# Altium PCB PCB2.PcbDoc
Units mil, origin at the board's own origin, x right, y up, seen from the top; angles counter-clockwise.
Board outline 3420 x 3585 mil, 2 copper layers (Top Layer, Bottom Layer); 16 components, 16 nets, 100 pads, 9 vias.
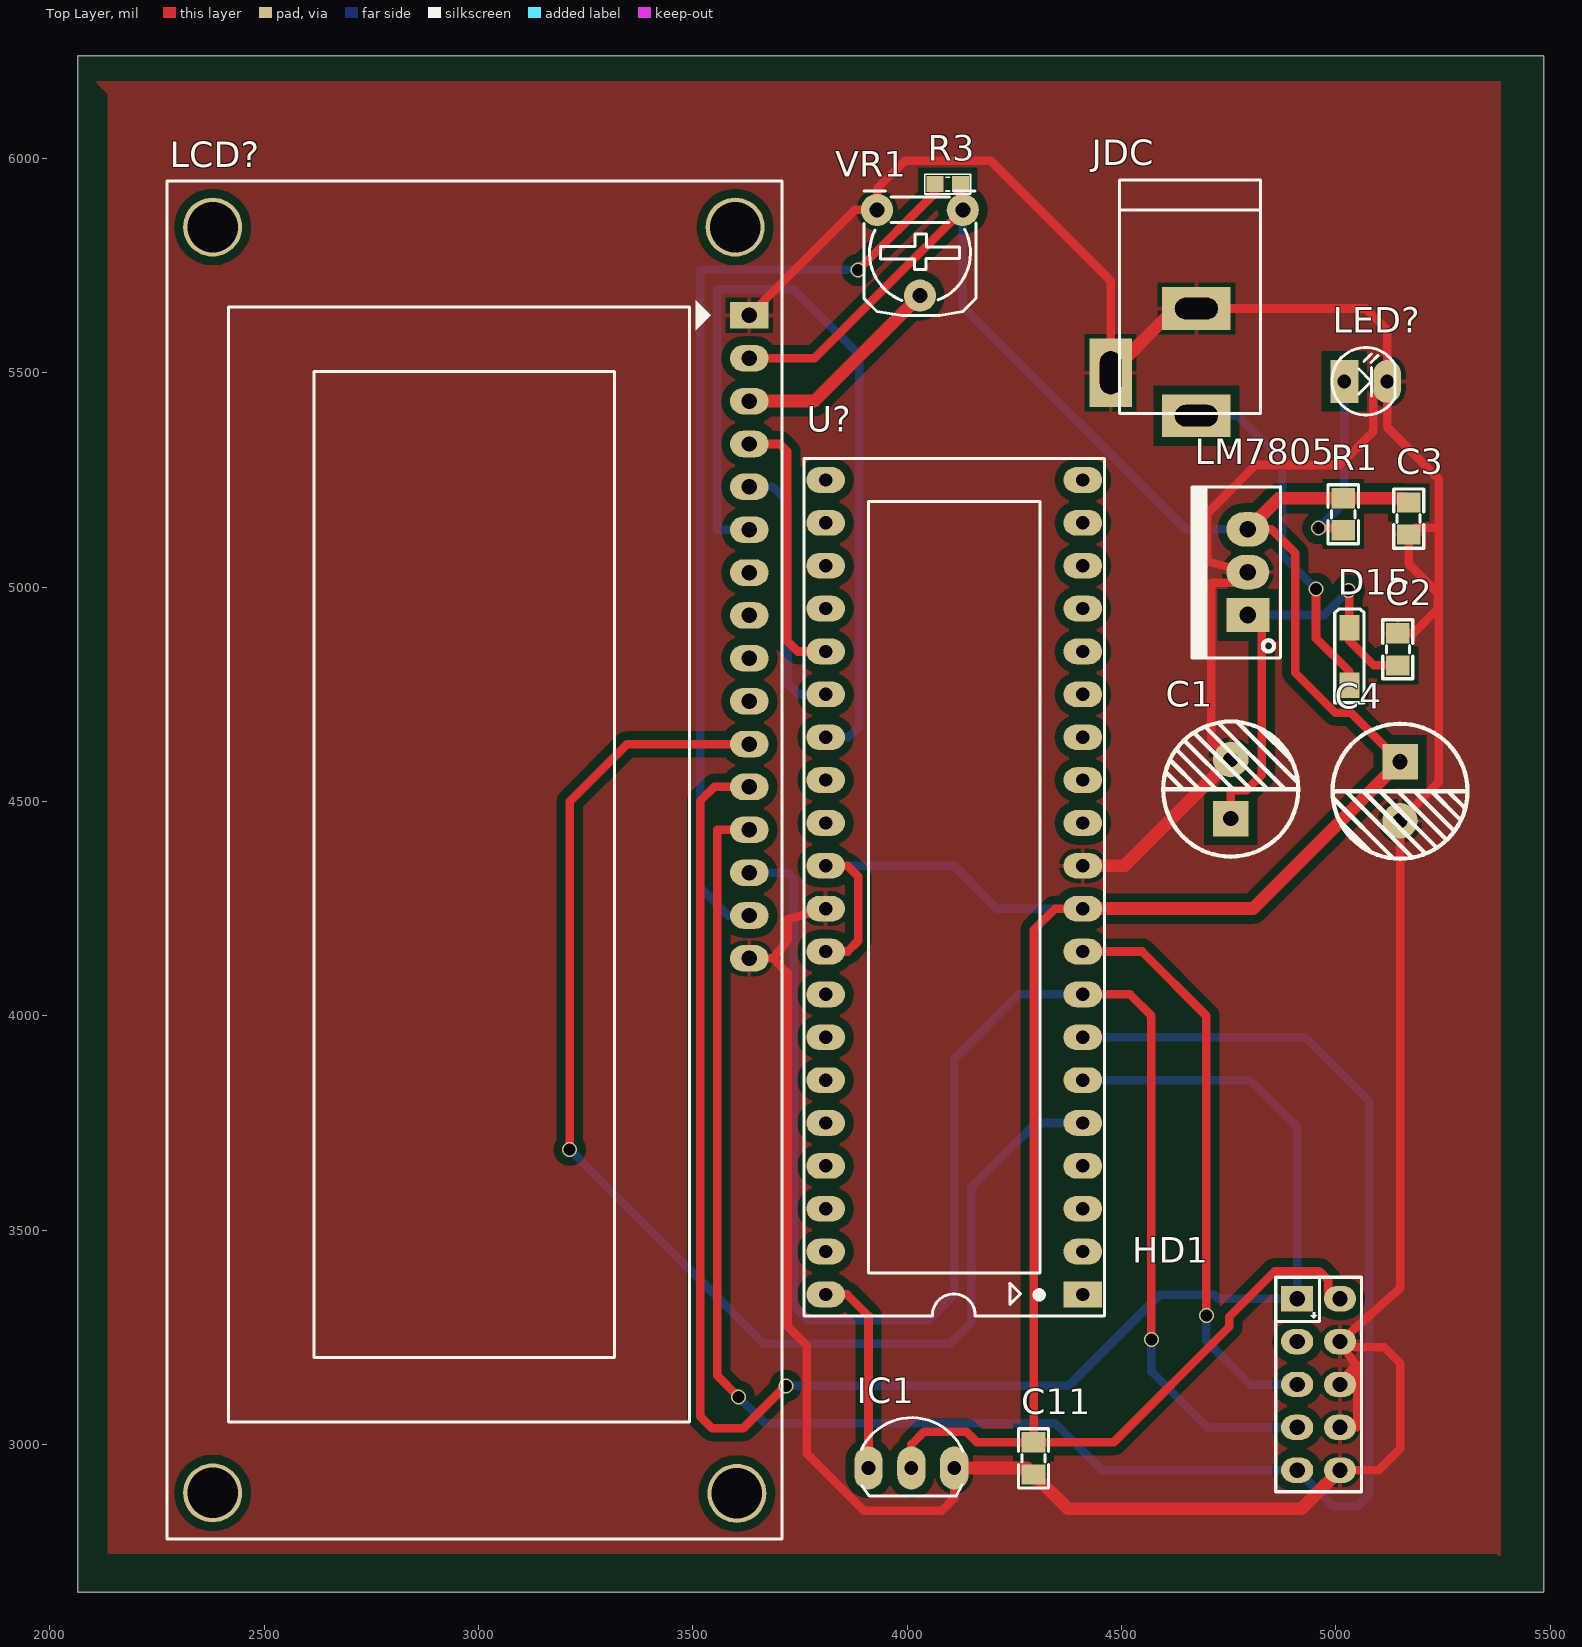
[diagram p0: Top Layer view]
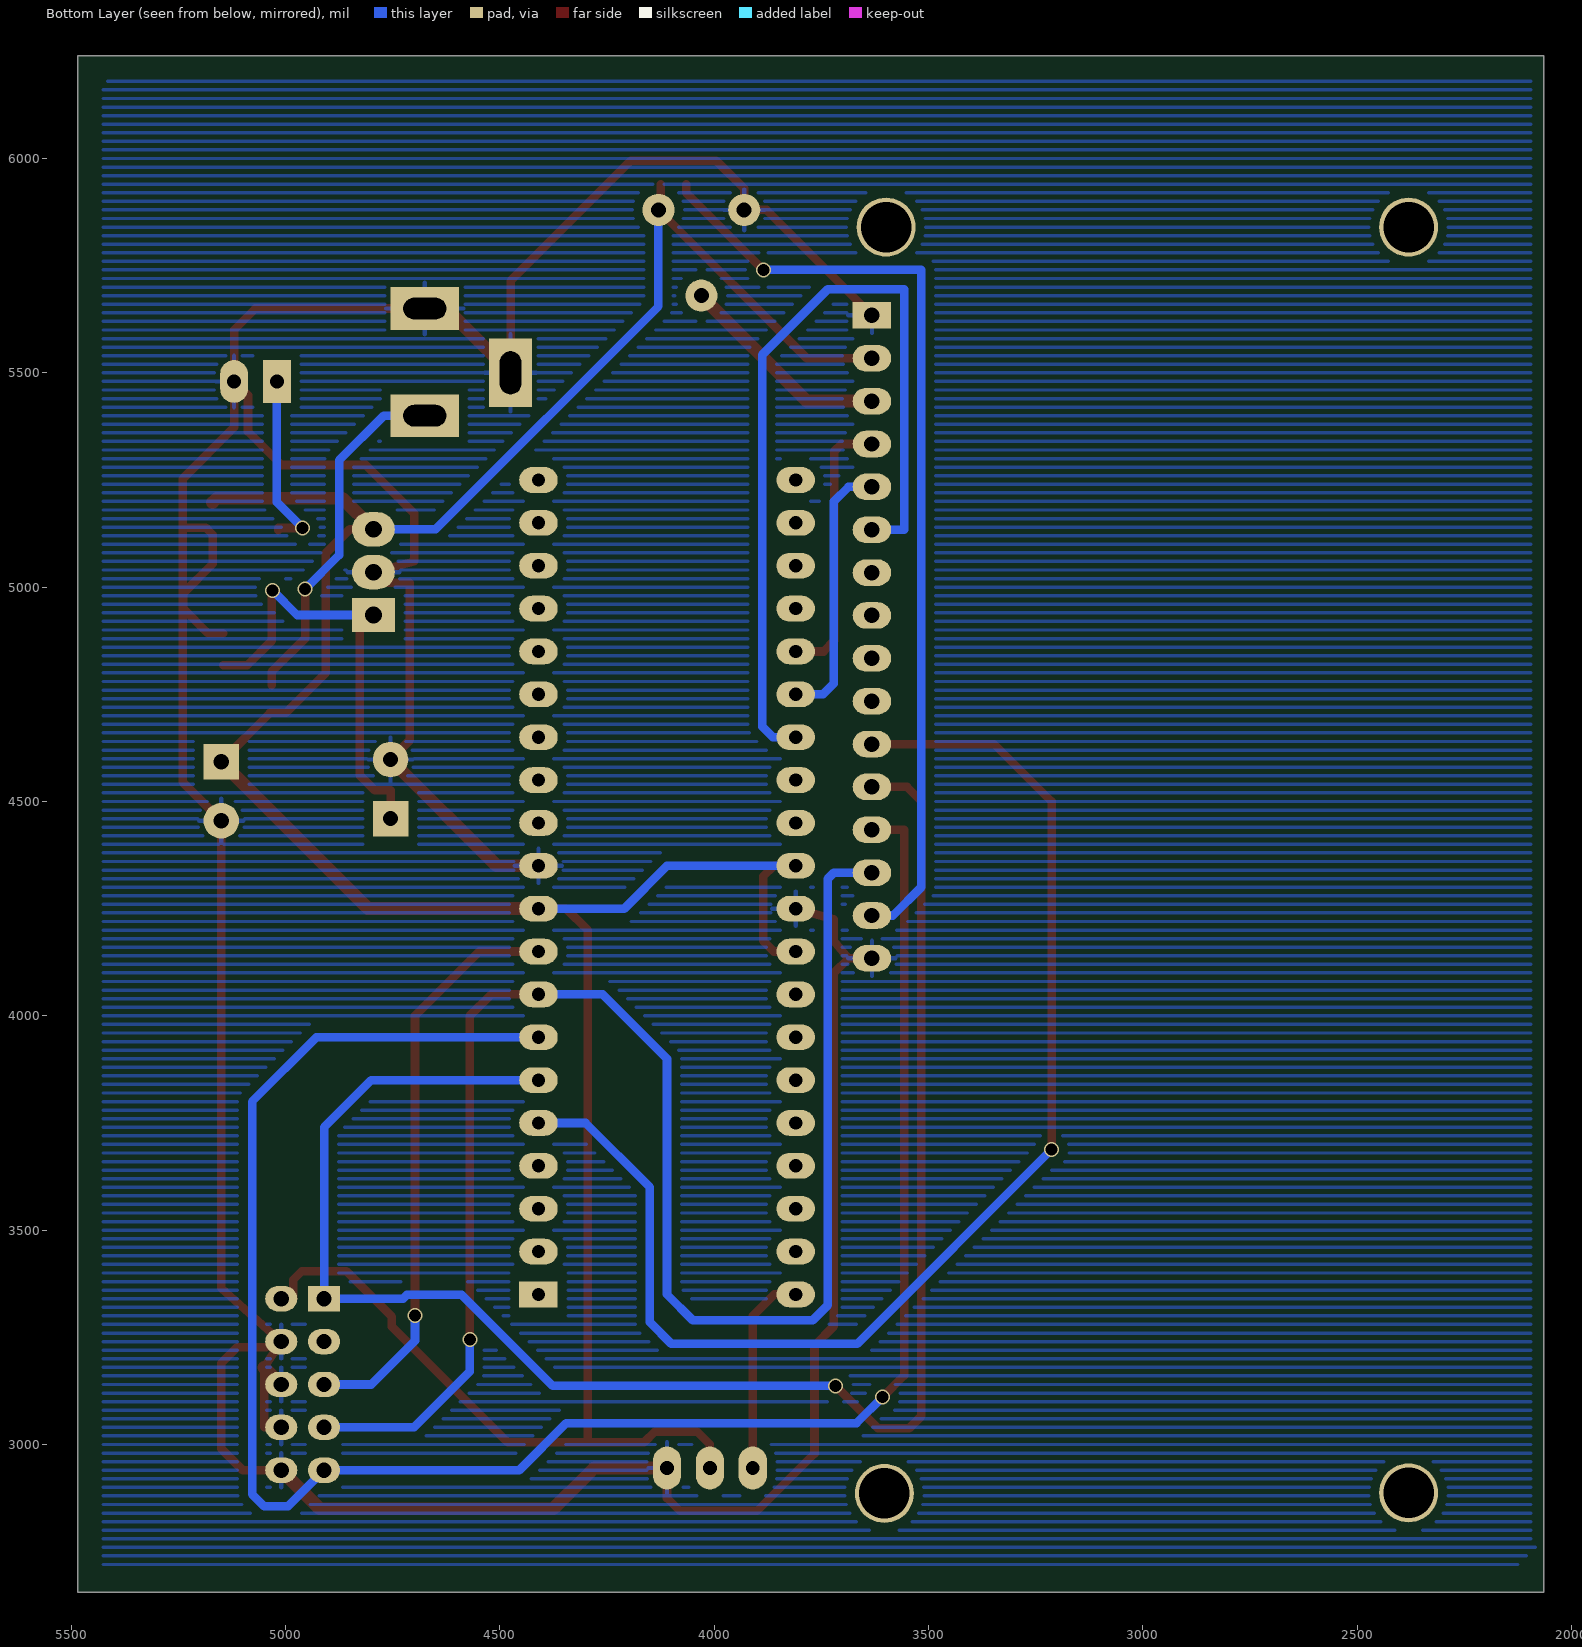
[diagram p1: Bottom Layer view, seen from below]
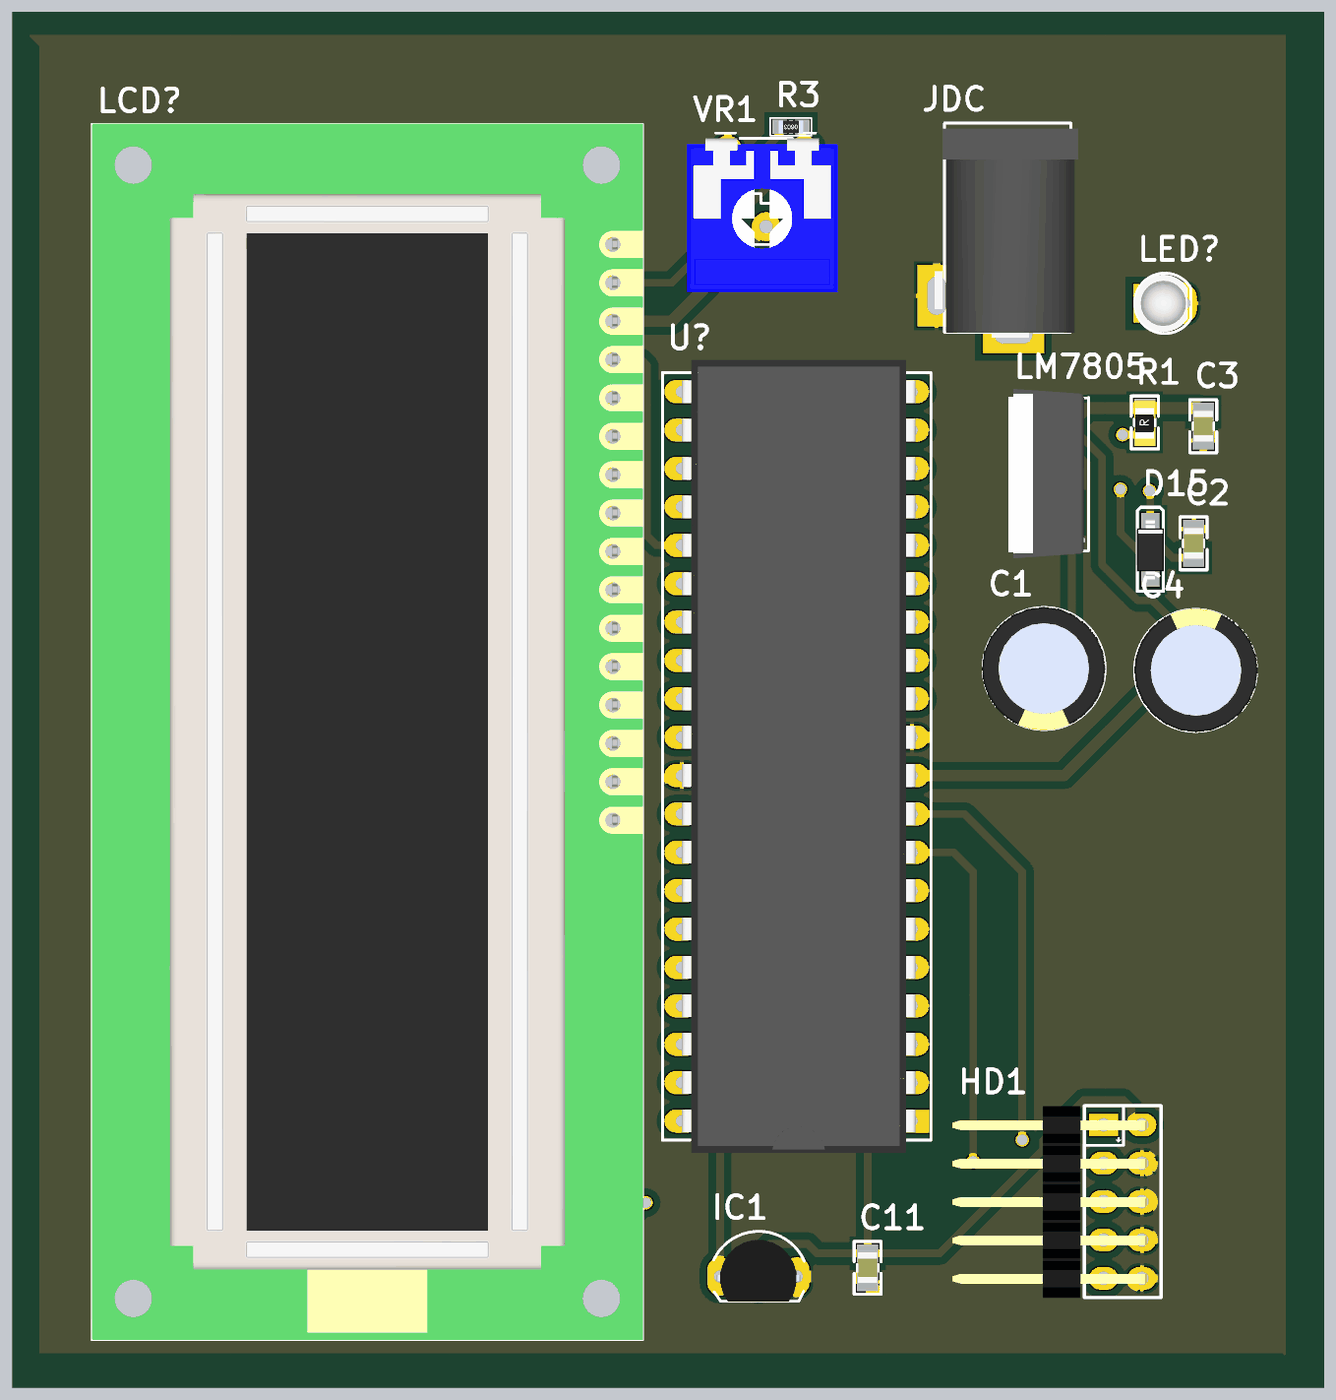
[diagram p2: 3D render of the assembled board from above, using the file's embedded part models]

## Layer stack, top to bottom
Top Solder: solder mask 0.4, Solder Resist, Dk 3.5
Top Layer: signal copper 1.4
Dielectric 1: dielectric 12.6, FR-4, Dk 4.8
Bottom Layer: signal copper 1.4
Bottom Solder: solder mask 0.4, Solder Resist, Dk 3.5

## Board outline
2065,2655 5485,2655 5485,6240 2065,6240

## Design rules (kind name [scope] priority, off if disabled: settings)
Clearance [All] p1: gap=20 ignorepadtopadclearanceinfootprint=FALSE
PolygonConnect [All] p1: connectstyle=Relief reliefconductorwidth=10 reliefentries=4 polygonreliefangle="90 Angle" airgapwidth=10
RoutingVias [All] p1: holewidth=28 width=35 viastyle="Through Hole" minholewidth=28 minwidth=35 maxholewidth=28 maxwidth=35
SolderMaskExpansion [All] p1: expansion=4
Width [All] p1: maxlimit=30 minlimit=20 preferedwidth=20
30 further rules are at their usual default settings.

## Components (designator, comment, footprint, x,y, rotation, side; value= is the part's Value field where it differs from the comment)
C1 "100uF" "tu hoa 8mm" 4755,4528.9 r90 top
C2 "104" "Tu 0805" 5145,4855 r270 top
C3 "104" "Tu 0805" 5170,5160 r90 top
C4 "100uF" "tu hoa 8mm" 5150,4523.9 r270 top
C11 "104" "Tu 0805" 4294.87,2967.43 r90 top
D15 "S4" "DIODE S4" 5030,4840 r90 top
HD1 "Header 5x2" HED2X5_cen 4910,3340 r270 top
IC1 "LM335" QTO-92 4010,2945 r0 top
JDC "Jac DC" DC-IN 4575,5525 r270 top
LCD? "LCD16x2A" LCD16X2 3632,5634 r270 top
LED? "LED" LED-3 5020,5480 r0 top value="LED 3 ly Single Colour"
LM7805 "LM7805" QTO-220 4795,4935 r90 top
R1 "330R" "Tro SMD 0805" 5015,5170 r90 top
R3 "1k" "tro smd 0603" 4095,5940 r180 top
U? "ATmega32A-PU" DIP40/W0.6 4410,3350 r90 top
VR1 "1K" VR 4130,5880 r180 top

## Footprints (in the part's own frame and the unit in brackets; to place one, negate y for a bottom-side part, rotate by r counter-clockwise, add the part's x,y. Pads: shape width x height; smd on the part's side, far side on the other; paste and mask are expansions set on the pad)
DC-IN [mil] "Jac DC input"
  rect 100x160 hole 50 slot 100 at 90 deg: 1(125,100) 2(-125,100)
  rect 160x100 hole 50 slot 100 at 0 deg: 3(25,-100)
  silkscreen extent -425,-80 120,250, body extent -410,-105 134,269, height 434
"DIODE S4" [mm]
  rect 1.5x1.2 smd: 1(-1.751,-0.051) 2(1.652,-0.051)
  silkscreen extent -2.79,-0.91 2.77,0.81, body extent -2,-0.95 1.9,0.85, height 1.18
DIP40/W0.6 [mil] "40 PIN, W 600mil, Pin to pin 100mil"
  rect 60x90 hole 31: 1(0,0)
  oval 60x90 hole 31: 2(100,0) 3(200,0) 4(300,0) 5(400,0) 6(500,0) 7(600,0) 8(700,0) 9(800,0) 10(900,0) 11(1000,0) 12(1100,0) 13(1200,0) 14(1300,0) 15(1400,0) 16(1500,0) 17(1600,0) 18(1700,0) 19(1800,0) 20(1900,0) 21(1900,600) 22(1800,600) 23(1700,600) 24(1600,600) 25(1500,600) 26(1400,600) 27(1300,600) 28(1200,600) 29(1100,600) 30(1000,600) 31(900,600) 32(800,600) 33(700,600) 34(600,600) 35(500,600) 36(400,600) 37(300,600) 38(200,600) 39(100,600) 40(0,600)
  silkscreen extent -50,-50 1950,650, body extent -82,-10 1982,600, height 224
HED2X5_cen [mm] "Connector; Header; 5x2 Position"
  rect 1.5x1.9 hole 0.9: 1(0,0)
  oval 1.5x1.9 hole 0.9: 2(2.54,0) 3(5.08,0) 4(7.62,0) 5(10.16,0) 6(0,2.54) 7(2.54,2.54) 8(5.08,2.54) 9(7.62,2.54) 10(10.16,2.54)
  silkscreen extent -1.27,-1.27 11.43,3.81, body extent -1.24,-10.02 11.46,2.86, height 5.02
LCD16X2 [mil] "LCD dipslay 16x2, 16 pin"
  rect 62x90 hole 36: 1(0,0)
  oval 62x90 hole 36: 2(100,0) 3(200,0) 4(300,0) 5(400,0) 6(500,0) 7(600,0) 8(700,0) 9(800,0) 10(900,0) 11(1000,0) 12(1100,0) 13(1200,0) 14(1300,0) 15(1400,0) 16(1500,0)
  round 137.8 hole 118.11: "Hole 0"(-206,-33) "Hole 0"(-206,-1252) "Hole 0"(2747,-1252) "Hole 0"(2748,-29)
  silkscreen extent -313,-1359 2854,76, body extent -315,-1360 2855,77, height 729
LED-3 [mil] "LED 2 PIN, 3ly Only colour"
  rect 65x100 hole 32: 1(0,0)
  oval 65x100 hole 32: 2(100,0)
  silkscreen extent -29,-78 118,79, body extent -29,-75 109,75, height 256
QTO-92 [mil] "TO-92"
  oval 66x100 hole 32: 1(-100,0) 2(0,0) 3(100,0)
  silkscreen extent -117,-65 120,118, body extent -109,-66 109,95, height 245
QTO-220 [mil] "TO-220 - 1-2-3"
  rect 80x100 hole 39: 1(0,0)
  oval 80x100 hole 39: 2(100,0) 3(200,0)
  silkscreen extent -100,-76 300,130, body extent -119,-64 322,121, height 755
"tro smd 0603" [mm] "Chip Capacitor, 2-Leads, Body 1,60x0,80mm, IPC Medium Density"
  rect 1x0.95 smd mask+0.076: 1(-0.75,0) 2(0.75,0)
  silkscreen extent -1.35,-0.58 1.37,0.58, body extent -0.82,-0.42 0.82,0.43, height 0.44
"Tro SMD 0805" [mm]
  rect 1.2x1.4 smd: 1(-0.946,-0.061) 2(0.954,-0.061)
  silkscreen extent -1.75,-0.97 1.75,0.84, body extent -1.56,-0.76 1.44,0.64, height 0.53
"Tu 0805" [mm] "Compoment SMD 80x50mil"
  rect 1.2x1.4 smd: 1(-0.946,-0.003) 2(0.954,-0.003)
  silkscreen extent -1.75,-0.89 1.75,0.89, body extent -1.01,-0.64 1.01,0.63, height 0.61
"tu hoa 8mm" [mm]
  rect 2.1x2.1 hole 0.9: 1(-1.75,0)
  round 2.1 hole 0.9: 2(1.75,0)
  silkscreen extent -4,-4 4,4, body extent -4.1,-4.07 4.1,4.13, height 13.81
VR [mil] "Resistor Variable"
  round 75 hole 35: 1(0,0) 2(100,200) 3(200,0)
  silkscreen extent -31,-44 231,246, body extent -87,-30 307,372, height 165

## Part data
C1 C4: library part "Tu Hoa 100uF 35V 8x11", "C?m", Chung_Loai=C?m, Don_Vi=Con, Ma_Hang=MH002807, So_Chan=2, Ten_Linh_Kien="T? Hóa 100uF 35V 8x11MM"
C2 C3 C11: library part "Tu 104", "Dán", Chung_Loai=Dán, Don_Vi=Con, Ma_Hang=MH004551, Ten_Linh_Kien="T? 0805 104-100nF 10% 50V"
D15: library part "Diode S4", "Dán", Chung_Loai=Dán, Don_Vi=Con, Ma_Hang=MH005519, Ten_Linh_Kien="Diode S4 SOD123 ( 1N5819 SOD123)"
HD1: library part HED5x2
IC1: "Teminal"
JDC: library part DCIN, "Jac DC input"
LCD?: library part LCD16x2, "LCD dipslay 16 char, 2 line"
LED?: "LED Single colour Green and Red"
LM7805: library part LM78xx, "On ap +, from + 5 to + 24VDC", =LM7815
R1: library part "Tro 0805 5% 330R", "Dán", Chung_Loai=Dán, Don_Vi=Con, Ma_Hang=MH005337, So_Chan=2, Ten_Linh_Kien="Tr? 0805 5% 330R"
R3: library part "Tro 0603 5% 1k", "Dán", Chung_Loai=Dán, Don_Vi=Con, Ma_Hang=MH006319, So_Chan=2, Ten_Linh_Kien="Tr? 0603 5% 1k"
U?: "8-Bit AVR Microcontroller with 32K Bytes of In-System Programmable Flash Memory", Supplier Part Number 1=ATMEGA32-16PC-ND, Code_JEDEC=MS-011-AC, ComponentLink1Description=Datasheet, ComponentLink1URL=http://www.atmel.com/dyn/resources/prod_documents/doc2503.pdf, ComponentLink2Description="Atmel.com Home", ComponentLink2URL=http://www.atmel.com, DatasheetVersion=2503C-AVR-10/02, PackageDescription="40-lead (0.600\"/15.24mm Wide) Plastic Dual Inline Package (PDIP)", PackageReference=40P6, PackageVersion="revB, Sep-2001", Published=17-Sep-2003, Publisher="Altium Limited", Supplier 1=Digi-Key, Supplier 2=Mouser, Supplier Part Number 2=556-ATMEGA32-16PC
VR1: library part "Bien Tro Tinh Chinh 1K", "C?m", Chung_Loai=C?m, Don_Vi=Con, Ma_Hang=MH003234, Ten_Linh_Kien="Bi?n Tr? VR 102-1K 3296W"

## Via types
v1: diameter 35, hole 28, Top Layer to Bottom Layer, 9 vias

## Nets (pads, with @x,y where several pads share a name; then routed paths per layer and width w, separated by ;. In a path a pad name is that pad's centre, name@x,y a point inside that pad or via, vN(x,y) a via of type N, cw(c..) or ccw(c..) an arc to the next point about the centre after c; other vN are vias at no path point)
D4: LCD?.11 U?.5 | length 3069
  Top Layer w20: v1(3213,3688) 3213,4500 3347,4634 LCD?.11
  Bottom Layer w20: v1(3213,3688) 3666,3235 4100,3235 4150,3285 4150,3600 4300,3750 U?.5
D5: HD1.1 LCD?.12 U?.6 | length 4046.6
  Top Layer w20: LCD?.12 3550,4534 3517,4501 3517,3066 3545,3038 3618,3038 v1(3717,3137)
  Bottom Layer w20: v1(3717,3137) 4377,3137 4589.29,3349.29 4716.71,3349.29 4726,3340 HD1.1 4910,3740 4800,3850 U?.6
D6: HD1.5 LCD?.13 U?.7 | length 4653.1
  Top Layer w20: v1(3607,3111) 3557,3161 3557,4434 LCD?.13
  Bottom Layer w20: v1(3607,3111) 3668,3050 4345,3050 4455,2940 HD1.5 4994,2856 5050,2856 5078,2884 5078,3800 4928,3950 U?.7
D7: HD1.4 LCD?.14 U?.8 | length 3834.8
  Top Layer w20: U?.8 4520,4050 4570,4000 v1(4570,3245)
  Bottom Layer w20: LCD?.14 3721,4334 3735,4320 3735,3325 3770,3290 4050,3290 4110,3350 4110,3900 4260,4050 U?.8 ; v1(4570,3245) 4570,3170 4700,3040 HD1.4
GND: C1.2 C2.1 C3.1 C4.2 C11.1 HD1.7 HD1.8 HD1.9 HD1.10 IC1.3 JDC.2 JDC.3 LCD?.1 LCD?.16 LED?.2 LM7805.2 U?.11 U?.31 VR1.3 | length 10490.9
  Top Layer w20: LCD?.16 3680,4134 3687,4134 ; LCD?.1 3878,5880 VR1.3 3930,5930 3995,5995 4195,5995 4475,5715 JDC.3 ; U?.31 3721,4225 3721,4175 3687,4134 ; IC1.3 4110,2875 4080,2845 3900,2845 3766,2979 3766,3231 3721,3276 3721,4100 3687,4134 ; JDC.2 5070,5650 5120,5600 LED?.2 ; C1.2 4710,4642.8 4710,5010 4770,5010 LM7805.2 4700,5060 4700,5172.22 4812.78,5285 5009.68,5285 5087.5,5362.83 5087.5,5447.5 LED?.2 ; HD1.10 5100,2940 5150,2990 5150,3190 5112.67,3227.33 5045.48,3227.33 HD1.7 ; HD1.9 5050,3040 5050,3180 HD1.7 ; C2.1 5180.72,4892.23 5238.49,4950 5238.49,4985.85 5170.13,5054.21 C3.1 5186.31,5138.95 5240,5138.95 ; HD1.7 5150,3365 C4.2 5240,4545 5240,5138.95 ; LED?.2 5120,5373 5240,5253 5240,5138.95
  Top Layer w30: IC1.3 4280.2,2945 C11.1 4375.2,2850 4920,2850 HD1.10 ; U?.11 4507.2,4350 C1.2 ; JDC.3 4625,5650 JDC.2 ; HD1.8 5050,3180
NetC1_1: C1.1 C2.2 D15.2 LM7805.1 | length 1071.7
  Top Layer w20: C1.1 4755,4526 4792,4526 4827,4561 4827,4935 LM7805.1 ; v1(5030,4992) 5032,4990 D15.2 5032,4875 5089.57,4817.43 C2.2
  Bottom Layer w20: LM7805.1 4973,4935 v1(5030,4992)
NetD15_1: D15.1 JDC.1 | length 833
  Top Layer w20: v1(4954,4996) 4954,4881 5032,4803 D15.1
  Bottom Layer w20: JDC.1 4771,5400 4875,5296 4875,5075 v1(4954,4996)
NetIC1_1: IC1.1 U?.40 | length 475.7
  Top Layer w20: U?.40 3860,3350 3910,3300 IC1.1
NetLCD?_3: LCD?.3 VR1.2 | length 499.9
  Top Layer w30: LCD?.3 3784,5434 VR1.2
NetLCD?_15: LCD?.15 R3.2 | length 2225.4
  Top Layer w20: v1(3885.47,5740) 4065.47,5920 R3.2
  Bottom Layer w20: LCD?.15 3583,4234 3517,4300 3517,5740 v1(3885.47,5740)
NetLED?_1: LED?.1 R1.1 | length 429.5
  Top Layer w20: v1(4960,5138) 5017.39,5138 R1.1
  Bottom Layer w20: v1(4960,5138) 5020,5198 LED?.1
PC3: LCD?.4 U?.25 | length 637.4
  Top Layer w20: LCD?.4 3703,5334 3720,5317 3720,4875 3745,4850 U?.25
PC4: LCD?.5 U?.26 | length 627.4
  Bottom Layer w20: LCD?.5 3687,5234 3721,5200 3721,4775 3746,4750 U?.26
PC5: LCD?.6 U?.27 | length 1985.7
  Bottom Layer w20: LCD?.6 3557,5134 3557,5695 3735,5695 3888,5542 3888,4675 3863,4650 U?.27
"RST IPS": HD1.3 U?.9 | length 1362.4
  Top Layer w20: U?.9 4548,4150 4698,4000 v1(4698,3301)
  Bottom Layer w20: v1(4698,3301) 4698,3242 4800,3140 HD1.3
VCC: C3.2 C4.1 C11.2 HD1.6 IC1.2 LCD?.2 LM7805.3 R1.2 R3.1 U?.10 U?.30 U?.32 VR1.1 | length 7447.7
  Top Layer w20: LCD?.2 3784,5534 VR1.1 4124.53,5885.47 R3.1 ; U?.32 3861,4150 3886,4175 3886,4325 3861,4350 U?.30 ; IC1.2 4010,3000 4040,3030 4138.17,3030 4163.17,3005 C11.2 ; U?.10 4345,4250 4295,4200 C11.2 ; LM7805.3 4850,5135 4906,5079 4906,4800 4999.45,4706.55 5036.24,4706.55 C4.1 ; HD1.6 4982.4,3340 4982.4,3384.03 4961.9,3404.53 4858.1,3404.53 4752.05,3298.48 4752.05,3275 4482.05,3005 C11.2
  Top Layer w30: U?.10 4807.2,4250 C4.1 ; LM7805.3 4867.57,5207.57 R1.2 5160.13,5207.57 C3.2
  Bottom Layer w20: U?.30 4110,4350 4210,4250 U?.10 ; VR1.1 4130,5655 4650,5135 LM7805.3
pads on no net: "LCD?.Hole 0" HD1.2 LCD?.7 LCD?.8 LCD?.9 LCD?.10 U?.1 U?.2 U?.3 U?.4 U?.12 U?.13 U?.14 U?.15 U?.16 U?.17 U?.18 U?.19 U?.20 U?.21 U?.22 U?.23 U?.24 U?.28 U?.29 U?.33 U?.34 U?.35 U?.36 U?.37 U?.38 U?.39

## Polygon pours and split planes (outlines as drawn)
GND on Bottom Layer (hatched Horizontal grid 20 track 8, remove dead copper, pour order 21): 2080,6200 5395,6200 5425,6170 5425,2700 2145,2700 2080,2765 2095,2780 2095,6185
no net on Bottom Layer (solid, remove dead copper, pour order 19): 2875,6085
GND on Top Layer (solid, remove dead copper, pour order 17): 2110,6180 5385,6180 5385,2735 5375,2745 2135,2745 2135,6150 2110,6175

## Silkscreen, mask and mechanical layers (free items; w line width, h text height)
Mechanical 1:
  the board outline again, w47.24